# Altium PCB IG-3.PCBDOC (part 2 of 3)
Units mil, origin at the board's own origin, x right, y up, seen from the top; angles counter-clockwise.
Board outline 1917.72 x 964.57 mil, 4 copper layers (Top, GND Plane, Mid1-Ver, Bottom), stack 61.6 mil thick; 39 components, 57 nets, 358 pads, 277 vias.
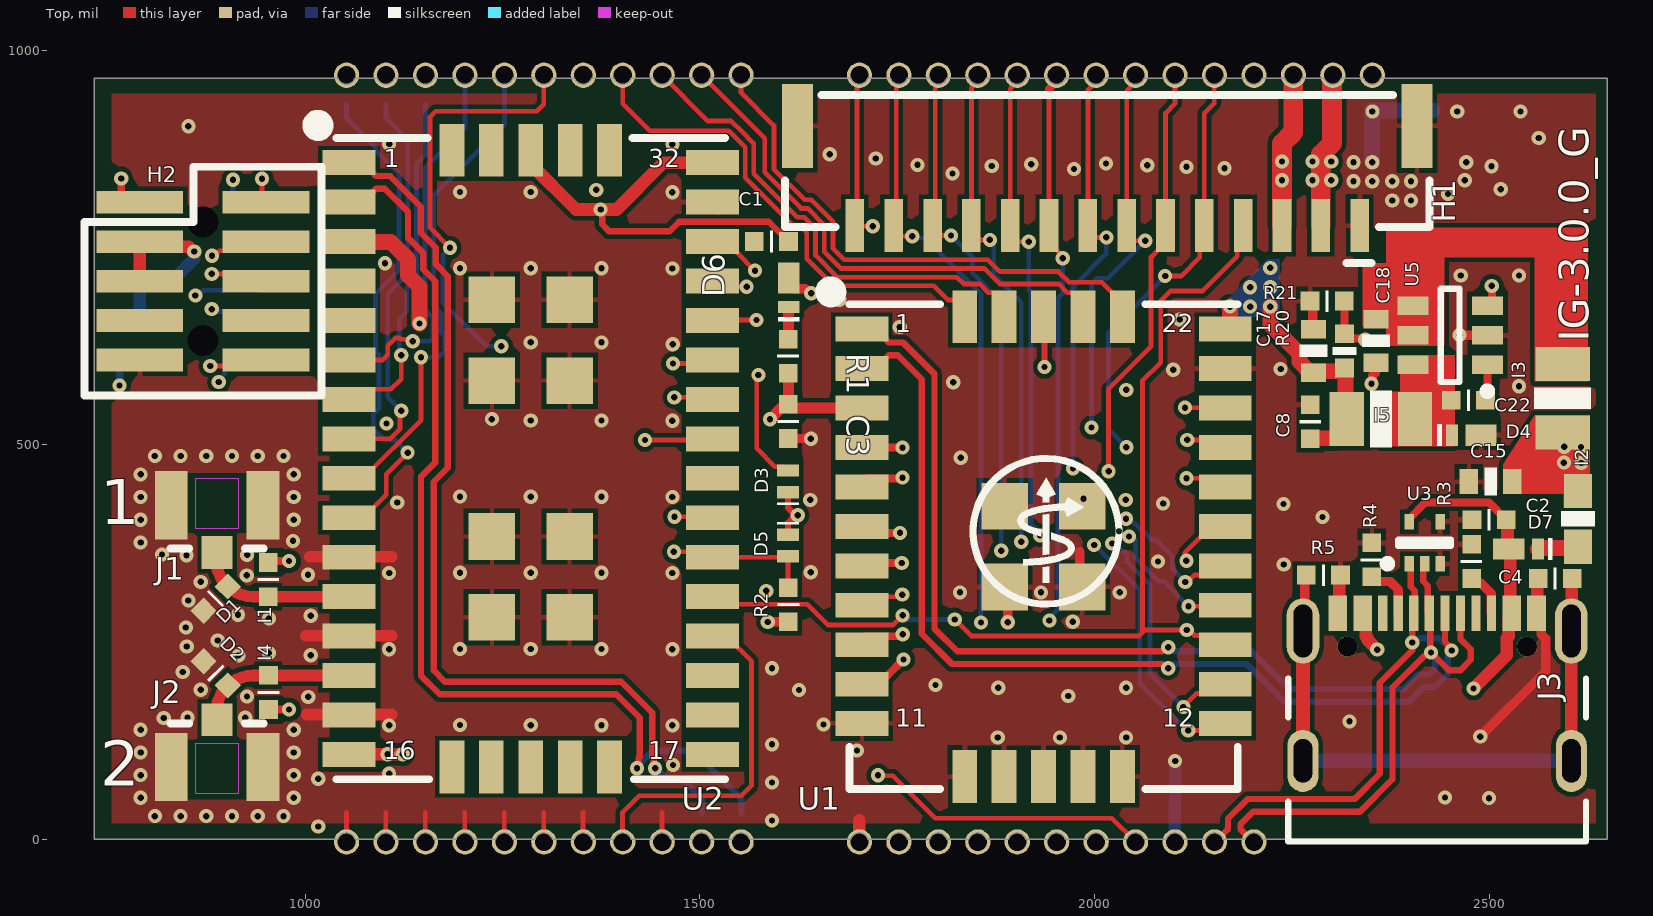
[diagram p0: Top view]

## Part data (continued)
R21: "RES 10.0K OHM 1/16W 1% 0402 SMD", Manufacturer=Yageo, Manufacturer Part Number=RC0402FR-0710KL, Package / Case="0402 (1005 Metric)", Power (Watts)="0.063W, 1/16W", Resistance (Ohms)=10K, Supplier Part Number 1=311-10.0KLRCT-ND, Temperature Coefficient=±100ppm/°C, Tolerance=±1%, Category=Resistors, ComponentLink1Description=http://www.yageo.com/documents/recent/PYu-RC0402_51_RoHS_L_6.pdf, ComponentLink1URL=http://www.yageo.com/documents/recent/PYu-RC0402_51_RoHS_L_6.pdf, Composition="Thick Film", Features=-, Height="0.014\" (0.35mm)", LatestRevisionDate=2-Dec-2009, Number of Terminations=2, Packaging="Cut Tape (CT)", Pricing 1="10=0.014, 50=0.0104, 100=0.0079, 250=0.00584, 500=0.00432, 1000=0.00288 (USD)", RoHS="RoHS Compliant", Size / Dimension="0.039\" L x 0.020\" W (1.00mm x 0.50mm)", Stock 1=5597980, Supplier 1=Digi-Key
U1: library part IS-IMX-6, "Inertial Sense IMX", Manufacturer="Inertial Sense", Manufacturer Part Number=IS-IMX-6, Supplier 1="Inertial Sense", Supplier Part Number 1=IS-IMX-6
U2: library part IS-GPX-1.0, "Inertial Sense GPX", Manufacturer="Inertial Sense", Manufacturer Part Number=IS-GPX-1, Supplier 1="Inertial Sense", Supplier Part Number 1=IS-GPX-1
U3: "TVS DIODE 5.5V SOT5", Breakdown Voltage=11V, Capacitance=1.5pF, Case/Package=SOT, Clamping Voltage=105.5V, Leakage Current=1nA, Manufacturer="Texas Instruments", Manufacturer Part Number=TPD3E001DRLR, Max Operating Temperature=85°C, Max Supply Current=100nA, Max Supply Voltage=5.5V, Min Operating Temperature=-40°C, Min Supply Voltage=900mV, Package Quantity=1, Peak Pulse Power=90W, Power Line Protection=Yes, Supplier Part Number 1=296-21885-1-ND, Depth=1.2mm, Direction=Unidirectional, Height=0.55mm, Interface=USB, Lead Free="Lead Free", Length=1.6mm, Max Supply Voltage (DC)=5.5V, Min Breakdown Voltage=11V, Min Supply Voltage (DC)=900mV, Nominal Supply Current=1nA, Number of Bidirectional Channels=3, Number of Channels=3, Number of Pins=5, Packaging="Tape and Reel", Pricing 1="1=0.53, 10=0.454, 100=0.3392, 500=0.26648, 1000=0.20592 (USD)", Radiation Hardening=No, REACH SVHC="No SVHC", Reverse Standoff Voltage=5.5V, Stock 1=81393, Supplier 1=Digi-Key, Termination=SMD/SMT, Weight=9.9E-05oz, Width=1.2mm
U4: library part IG_2.0_LGA, "IMX multi-frequency RTK-GNSS Module"
U5: "IC BUCK ADJ 1.2A 6TSOT", Current - Output=1.2A, Frequency - Switching=1.4MHz, Manufacturer="Analog Devices Inc", Manufacturer Part Number=ADP2301AUJZ-R7, Operating Temperature="-40°C ~ 125°C", Package / Case="SOT-23-6 Thin, TSOT-23-6", Supplier Device Package=TSOT-6, Supplier Part Number 1=ADP2301AUJZ-R7CT-ND, Voltage - Input="3 V ~ 20 V", Voltage - Output="0.8 V ~ 17 V", Category="Integrated Circuits (ICs)", ComponentLink1Description=http://www.analog.com/static/imported-files/data_sheets/ADP2300_2301.pdf, ComponentLink1URL=http://www.analog.com/static/imported-files/data_sheets/ADP2300_2301.pdf, Mounting Type="Surface Mount", Number of Outputs=1, Output Type=Adjustable, Packaging="Cut Tape (CT)", Pricing 1="1=3.06, 25=2.4992, 100=2.244, 250=2.04, 500=1.785, 1000=1.53 (USD)", PWM Type="Current Mode", RoHS="RoHS Compliant", Stock 1=6699, Supplier 1=Digi-Key, Synchronous Rectifier=No, Type="Step-Down (Buck)"

## Via types
v1: diameter 18, hole 8, Top to Bottom, 277 vias

## Nets (pads, with @x,y where several pads share a name; then routed paths per layer and width w, separated by ;. In a path a pad name is that pad's centre, name@x,y a point inside that pad or via, vN(x,y) a via of type N, cw(c..) or ccw(c..) an arc to the next point about the centre after c; other vN are vias at no path point)
+3.3V: C1.1 C8.1 C17.1 D6.A H1.3 H2.1 H3.1 I5.2 R2.1 R20.2 U1.22 U1.30 U2.32 U2.40 U4.3 U4.30 | length 1321.6
  Top w6: U1.30@1934.65,662.91 U1.30@1935.47,662.09
  Top w8: v1(1374.04,797.98) 1375.96,796.07 1375.96,779.16 1384.65,770.47 1461.42,770.47 1473.5,782.56 1587.13,782.56 C1.1@1612.2,757.48 ; U1.30@1934.65,662.91 1936.61,660.94 v1(1936.61,598.43)
  Top w10: v1(766.5,837.33) 766.5,816.59 776,807.09 H2.1@790.08,807.09
  Top w12: v1(1585.83,275.2) 1585.97,275.34 1611.73,275.34 R2.1@1611.88,275.48 ; D6.A@1612.51,711.3 1612.51,705.09 1620.09,697.51 1633.54,697.51 1639.32,691.73 v1(1640.94,691.73)
  Top w16: U2.40@1285.49,873.05 1285.49,855.34 1342.8,798.02 1394.48,798.02 1453.76,857.31 U2.32@1515.8,857.31 U2.32@1523.55,849.56
  Top w20: U1.22@2165.79,646.34 2166.01,646.34 2171.76,652.09 v1(2171.76,674.9) ; v1(2222.62,674.9) 2222.62,652.46 2259.91,615.17 2259.91,604.89 2273.54,591.25 C17.1@2277.48,591.25 2279.29,593.06 2312.76,593.06 R20.2@2316.85,597.15 2318.22,595.79 2318.22,533.87 I5.2@2319.58,532.51 2319.58,519.71 2307.93,508.06 2274.36,508.06 C8.1@2273.56,507.26
  Top w25: H1.3@2237.67,777.61 2237.67,881.68 2251.87,895.88 U4.3@2251.87,966.09
  Bottom w10: v1(764.17,574.8) 764.17,597.59 773.67,607.09 H3.1@790.08,607.09
  other v1: 2197.19,674.9 2197.19,699.42 2222.62,699.42 2222.62,723.94 2237.67,834.99 2237.67,858.89
FB: R20.1 R21.2 U5.3 | length 283.4
  Top w10: R21.2@2316.85,679.83 R20.1@2316.85,640.46 2322.69,634.62 2339.33,634.62 2341.11,632.84 v1@2343.27,632.84 ; U5.3@2501.6,676.21 2503.54,678.16 v1(2503.54,701.18)
  Mid1-Ver w10: v1(2343.11,633.01) 2409.63,633.01 2477.8,701.18 v1(2503.54,701.18)
G1/Rx2/RxCAN/SCL: H1.5 U1.4 U4.5 | length 895.2
  Top w6: v1@2039.71,497.38 v1(2040.37,496.73) ; v1(2089.5,713.57) 2109.9,713.57 2133.47,737.14 2133.47,771.83 H1.5@2139.25,777.61 2139.25,919.77 2151.87,932.39 2151.87,952.71 U4.5@2151.87,966.09
  Top w10: U1.4@1698.27,496.33 1698.46,496.13 v1(1756.54,496.13)
  Mid1-Ver w6: v1(1756.54,496.13) 1758.75,496.13 1766.22,503.6 2030.79,503.6 2037.66,496.73 v1(2040.37,496.73)
  Bottom w6: v1(2040.37,496.73) 2017.86,519.23 2017.86,641.93 v1(2089.5,713.57)
G2/Tx2TxCAN/SDA/STRB: H1.6 U1.5 U4.6 | length 867
  Top w6: v1(2017.86,466.16) 2017.86,571.01 2071.74,624.89 2071.74,737.66 2082.22,748.14 2082.22,769.8 H1.6@2090.03,777.61 2090.03,920.16 2101.87,932 U4.6@2101.87,966.09
  Top w10: U1.5@1699.69,444.9 1711.87,457.08 1755.6,457.08 v1(1756.69,458.17)
  Mid1-Ver w6: v1(1756.69,458.17) 1757.96,456.89 1796.35,456.89 1801.35,451.89 1958.1,451.89 1958.25,451.75 2001.26,451.75 2015.66,466.16 v1(2017.86,466.16)
G5/SCLK/STRBE: H1.9 U1.9 U4.9 | length 979.5
  Top w6: 1942.4,950.66 1942.4,755.95 1959.84,738.51 v1(1959.84,736.22) ; v1@1942.6,277.28 v1(1942.81,277.08)
  Top w10: U1.9@1698.27,246.33 1709.01,257.08 1752.18,257.08 1754.71,259.61 v1(1756.88,259.61) ; 1942.4,950.66 1951.87,960.14 U4.9@1951.87,966.09
  Mid1-Ver w6: v1(1756.88,259.61) 1759.17,261.91 1773.34,261.91 1804.29,292.85 1813.3,292.85 1815.79,295.35 1829.88,295.35 1832.37,292.85 1927.04,292.85 v1(1942.81,277.08)
  Bottom w6: v1@1942.81,277.49 1942.81,280.32 1953.61,291.13 1953.61,685.63 1959.84,691.86 v1(1959.84,736.22)
G6/Rx1/MOSI: H1.10 U1.6 U4.10 | length 848.9
  Top w6: U4.10@1901.87,966.09 1901.87,959.6 1893.18,950.91 1893.18,765.9 1901.99,757.09 v1(1916.58,757.09)
  Top w10: U1.6@1699.85,394.75 1706.52,388.08 v1(1753.51,388.08)
  Mid1-Ver w6: v1(1753.51,388.08) 1778.24,388.08 1784.24,394.08 1918.44,394.08 1927.59,384.93 v1(1930.83,384.93)
  Bottom w6: v1(1916.58,757.09) 1916.58,696.3 1919.61,693.27 1919.61,399.17 1930.83,387.95 v1(1930.83,384.93)
G7/Tx1/MISO: H1.11 U1.7 U4.11 | length 853.8
  Top w6: U4.11@1851.87,966.09 1851.87,959.6 1843.97,951.7 1843.97,768.26 1852.78,759.45 v1(1867.37,759.45)
  Top w10: U1.7@1698.27,346.33 1701.85,349.92 v1(1755.64,349.92)
  Mid1-Ver w6: v1@1756.13,349.92 1756.13,350.41 1788.8,383.08 1888.36,383.08 1892.4,379.04 1904.82,379.04 v1(1907.11,376.75)
  Bottom w6: v1(1867.37,759.45) 1867.37,756.2 1872.44,751.13 1872.44,715.21 1907.11,680.54 v1(1907.11,376.75)
G8/C\S\/STRB: H1.12 U1.8 U4.12 | length 861.5
  Top w6: U1.8@1698.27,296.33 1709.01,307.08 1751.48,307.08 1754.27,309.86 v1(1756.43,309.86) ; U4.12@1801.87,966.09 1798.31,962.54 1798.31,781.16 H1.12@1794.76,777.61 1794.76,773.77 1803.57,764.96 v1(1818.16,764.96)
  Mid1-Ver w6: v1@1755.35,309.86 v1(1756.43,309.86) 1812.07,365.5 v1(1881.9,365.5)
  Bottom w6: v1(1818.16,764.96) 1845.45,737.67 1845.45,717.1 1881.9,680.66 v1(1881.9,365.5)
G9/S\P\I\_\E\N\/DRDY/STRB: H1.13 U1.10 U4.13 | length 931.9
  Top w6: U4.13@1751.87,966.09 1748.71,962.93 1748.71,780.77 H1.13@1745.55,777.61 1745.55,772.86 1754.36,764.05 v1(1768.95,764.05)
  Top w10: U1.10@1709.01,207.08 1737.39,207.08 v1(1757.86,227.55)
  Mid1-Ver w6: v1(1757.86,227.55) 1791.66,261.35 1843.02,261.35 v1(1856.15,274.48)
  Bottom w6: v1(1768.95,764.05) 1771.24,761.75 1785.24,761.75 1856.15,690.84 v1(1856.15,274.48)
G10/CHIP_ERASE: U1.17 U4.17 | length 571.8
  Top w6: v1(2116.42,352.67) 2114.5,354.58 2114.5,362.5 2114.37,362.63 2148.07,396.33 U1.17@2172.68,396.33
  Mid1-Ver w6: U4.17@1802.09,-3.54 1933.3,127.67 1933.3,173.52 2096.76,336.97 2100.66,336.97 2116.36,352.67 v1(2116.42,352.67)